# Altium PCB ARC.PcbDoc
Units mil, origin at the board's own origin, x right, y up, seen from the top; angles counter-clockwise.
Board outline 3900 x 2100 mil, 2 copper layers (Top Layer, Bottom Layer); 47 components, 145 nets, 312 pads, 6 vias.
Unrouted connection lines stored in the file: 137.
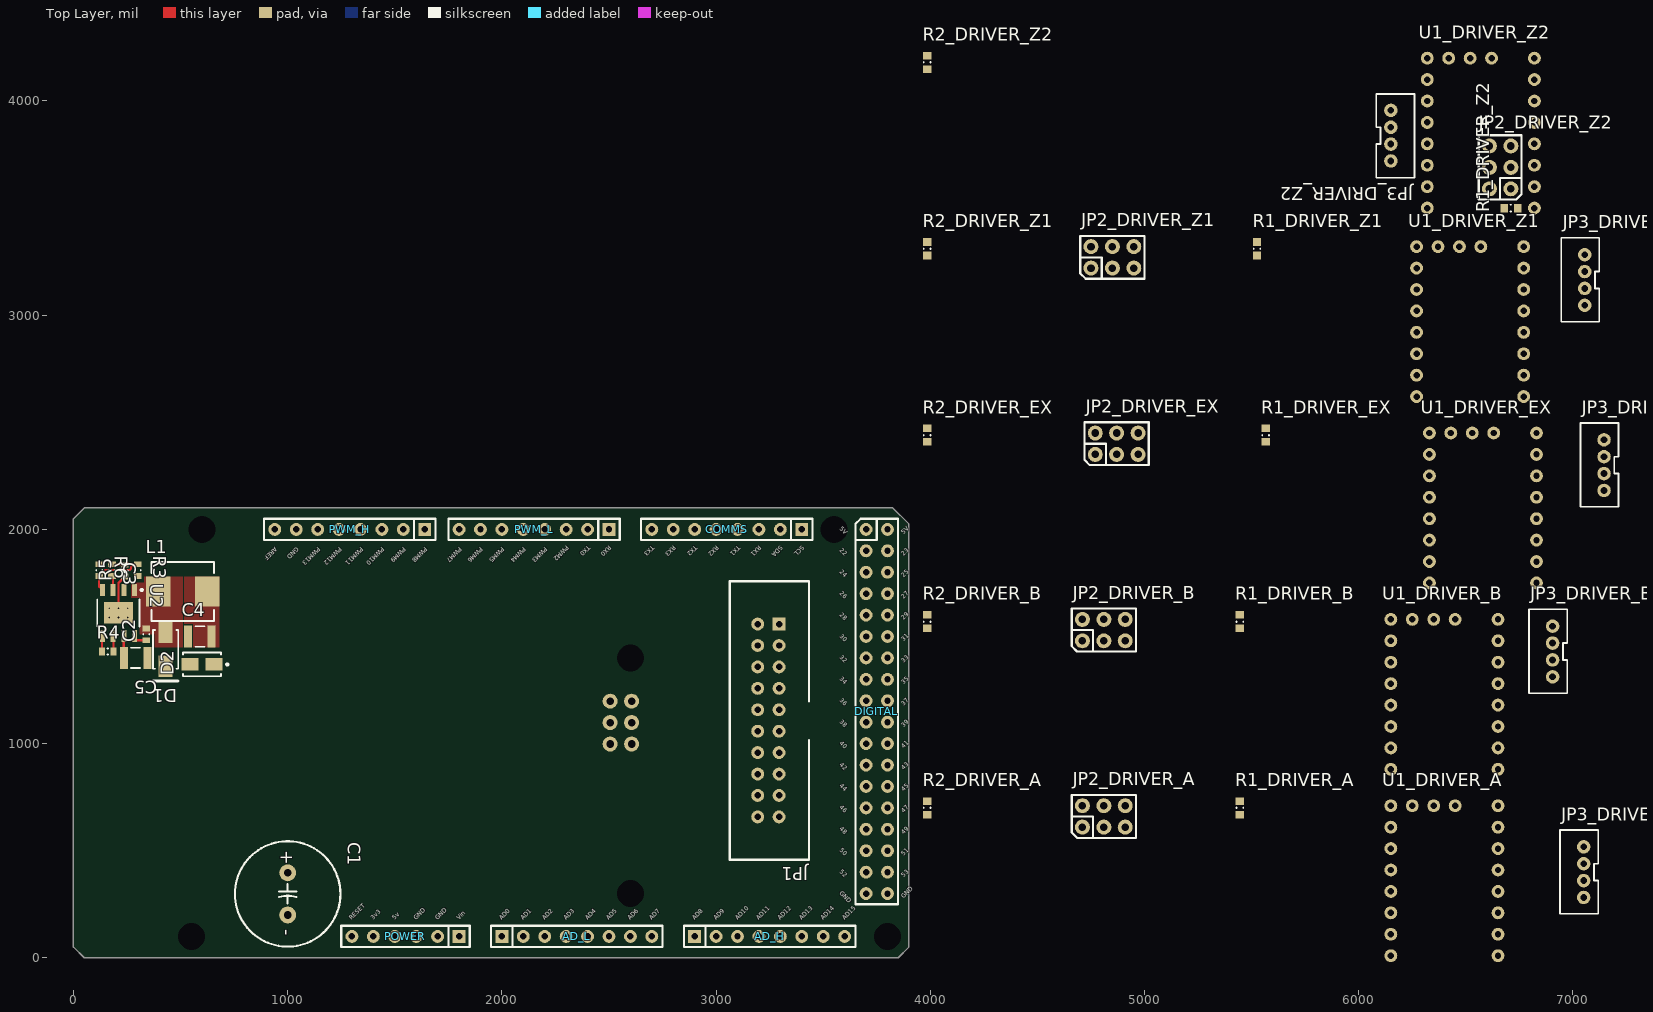
[diagram p0: Top Layer view]
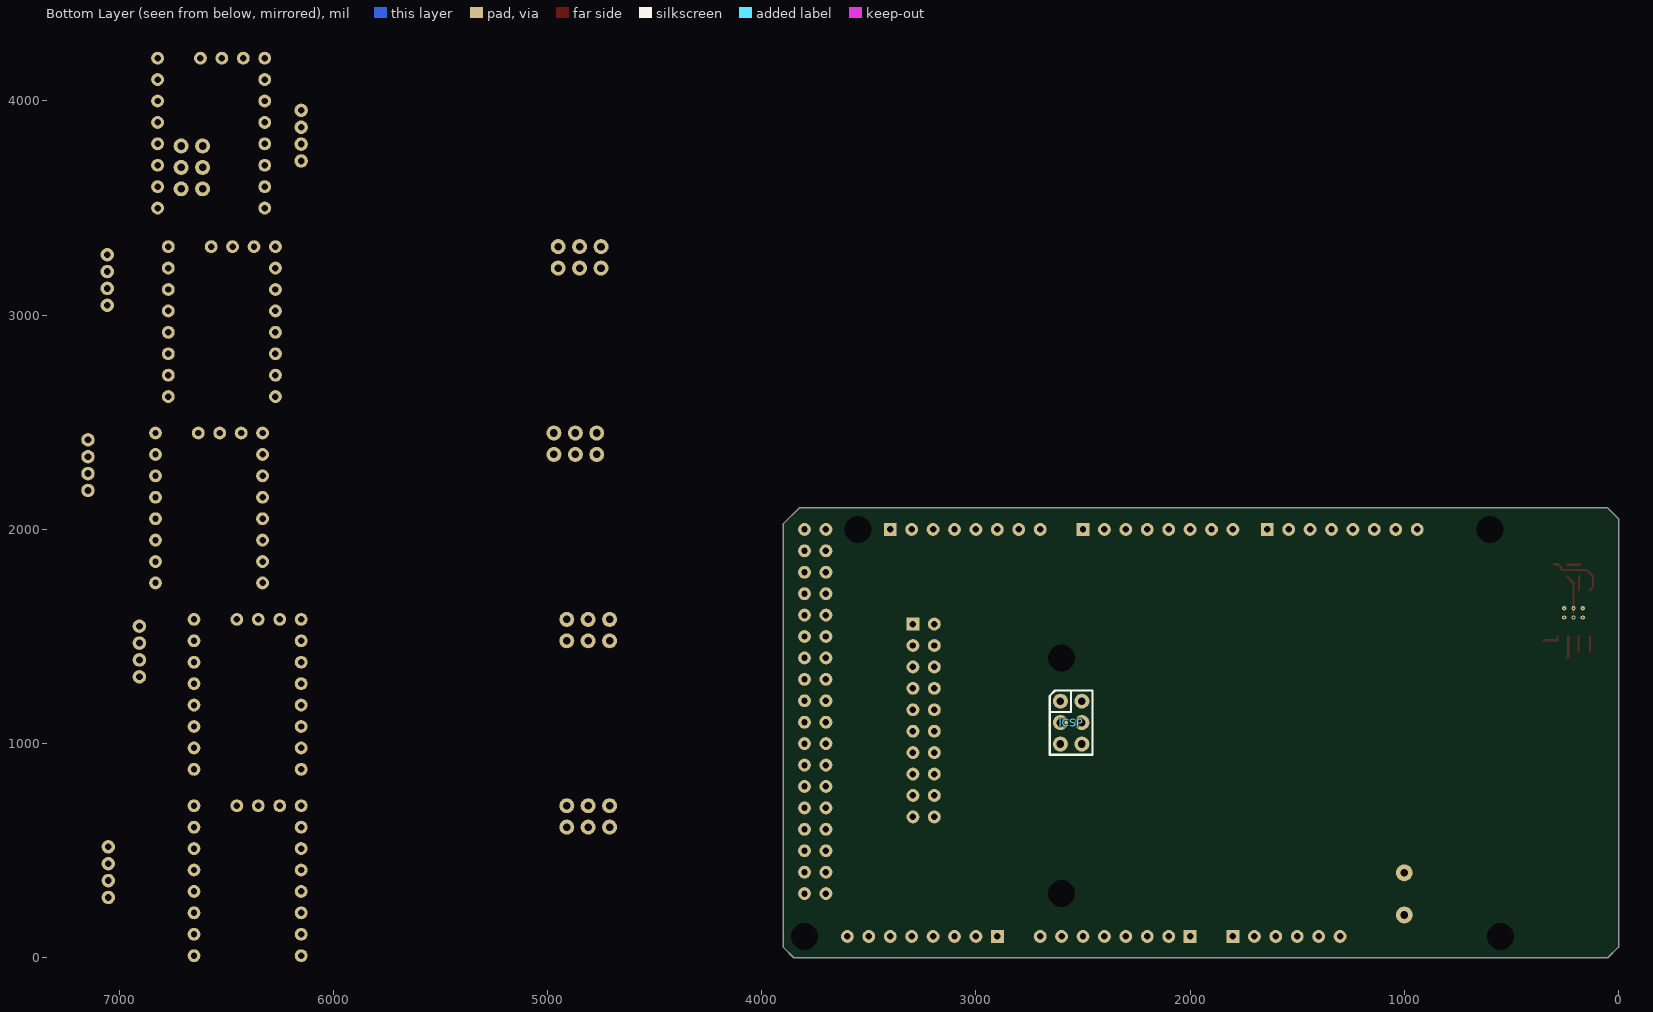
[diagram p1: Bottom Layer view, seen from below]

## Layer stack, top to bottom
Top Solder: solder mask 0.4, Solder Resist, Dk 3.5
Top Layer: signal copper 1.4
Dielectric1: dielectric 12.6, FR-4, Dk 4.8
Bottom Layer: signal copper 1.4
Bottom Solder: solder mask 0.4, Solder Resist, Dk 3.5

## Board outline
50,0 0,50 0,2050 50,2100 3825,2100 3900,2025 3900,50 3850,0

## Design rules (kind name [scope] priority, off if disabled: settings)
Clearance [All] p1: gap=6
PolygonConnect PolygonConnect_1 [All vs IsNamedPolygon('Direct')] p1: connectstyle=Direct reliefconductorwidth=10 reliefentries=4 polygonreliefangle="90 Angle" airgapwidth=10
PolygonConnect [All] p2: connectstyle=Relief reliefconductorwidth=10 reliefentries=4 polygonreliefangle="90 Angle" airgapwidth=10
RoomDefinition ARC [InComponentClass('ARC')] p1: confinementstyle=ConfineIn formatcopy=TRUE lockcomponents=FALSE outline -1200,-1230 800,-1230 800,-230 -1200,-230
RoomDefinition Designator [InComponentClass('Designator')] p2: confinementstyle=ConfineIn formatcopy=TRUE lockcomponents=FALSE outline 0,1230 780,1230 780,1980 0,1980
RoomDefinition DRIVER_Z2 [InComponentClass('DRIVER_Z2')] p3: confinementstyle=ConfineIn formatcopy=TRUE lockcomponents=FALSE outline 3945,3435 7810,3435 7810,4360 3945,4360
RoomDefinition DRIVER_Z1 [InComponentClass('DRIVER_Z1')] p4: confinementstyle=ConfineIn formatcopy=TRUE lockcomponents=FALSE outline 3945,2565 7710,2565 7710,3490 3945,3490
RoomDefinition DRIVER_EX [InComponentClass('DRIVER_EX')] p5: confinementstyle=ConfineIn formatcopy=TRUE lockcomponents=FALSE outline 3945,1695 7810,1695 7810,2620 3945,2620
RoomDefinition DRIVER_B [InComponentClass('DRIVER_B')] p6: confinementstyle=ConfineIn formatcopy=TRUE lockcomponents=FALSE outline 3945,825 7510,825 7510,1750 3945,1750
RoomDefinition DRIVER_A [InComponentClass('DRIVER_A')] p7: confinementstyle=ConfineIn formatcopy=TRUE lockcomponents=FALSE outline 3945,-45 7510,-45 7510,880 3945,880
RoutingVias [All] p1: holewidth=28 width=50 viastyle="Through Hole" minholewidth=28 minwidth=50 maxholewidth=28 maxwidth=50
SilkToSolderMaskClearance SilkscreenOverComponentPads [IsPad] p1: minsilkscreentomaskgap=10 clearancetoexposedcopper=TRUE
SolderMaskExpansion [All] p1: expansion=4
Width [All] p1: maxlimit=10 minlimit=10 preferedwidth=10
29 further rules are at their usual default settings.

## Classes and differential pairs
component class Designator: C2 C3 C4 C5 D1 D2 L1 R3 R4 R5 R6 U2
component class ARC: * AD_H AD_L Analog C1 COMMS DIGITAL ICSP JP1 POWER PWM_H PWM_L
component class DRIVER_A: JP2_DRIVER_A JP3_DRIVER_A JP*_DRIVER_A R1_DRIVER_A R2_DRIVER_A U1_DRIVER_A
component class DRIVER_B: JP2_DRIVER_B JP3_DRIVER_B JP*_DRIVER_B R1_DRIVER_B R2_DRIVER_B U1_DRIVER_B
component class DRIVER_EX: JP2_DRIVER_EX JP3_DRIVER_EX JP*_DRIVER_EX R1_DRIVER_EX R2_DRIVER_EX U1_DRIVER_EX
component class DRIVER_Z1: JP2_DRIVER_Z1 JP3_DRIVER_Z1 JP*_DRIVER_Z1 R1_DRIVER_Z1 R2_DRIVER_Z1 U1_DRIVER_Z1
component class DRIVER_Z2: JP2_DRIVER_Z2 JP3_DRIVER_Z2 JP*_DRIVER_Z2 R1_DRIVER_Z2 R2_DRIVER_Z2 U1_DRIVER_Z2
channel class StepperDriver: DRIVER_A DRIVER_B DRIVER_EX DRIVER_Z1 DRIVER_Z2

## Components (designator, comment, footprint, x,y, rotation, side; value= is the part's Value field where it differs from the comment)
AD_H "AD_H" "HEADER 8X1 8.5MM" 2900,100 r0 top locked
AD_L "AD_L" "HEADER 8X1 8.5MM" 2000,100 r0 top locked
C1 "1000uF" CAP_12.5mm 1000,396.85 r270 top
C2 "100nF" CAPC0603(1608)100_L 340,1510 r90 top
C3 "150pF" CAPC0603(1608)100_L 180,1810 r270 top
C4 "22uF" CAPC1210(3225)170_L 590,1500 r0 top
C5 "10uF" CAPC1210(3225)280_L 290,1400 r180 top
COMMS "Communication" "HEADER 8X1 8.5MM" 3400,2000 r180 top locked
D1 "B340A" DIOD-SMA-2_V 430,1440 r270 top
D2 "5V TVS" VISH-DO-214AC-2_L 600,1370 r180 top
DIGITAL "IO_36" "HEADER 36X 8MM" 3800,2000 r270 top locked
ICSP "ICSP" ICSP 2605.51,1198.03 r180 bottom locked
JP1 "EXTRUDER_OUT" IDC20 3294,1558 r270 top
JP2_DRIVER_A "2x3 HEADER" "2X3 HEADER" 4710,610 r90 top (schematic designator JP2)
JP2_DRIVER_B "2x3 HEADER" "2X3 HEADER" 4710,1480 r90 top (schematic designator JP2)
JP2_DRIVER_EX "2x3 HEADER" "2X3 HEADER" 4770,2350 r90 top (schematic designator JP2)
JP2_DRIVER_Z1 "2x3 HEADER" "2X3 HEADER" 4750,3220 r90 top (schematic designator JP2)
JP2_DRIVER_Z2 "2x3 HEADER" "2X3 HEADER" 6710,3590 r180 top (schematic designator JP2)
JP3_DRIVER_A "JST_PH 4" "JST_PH 4" 7050,400 r90 top (schematic designator JP3)
JP3_DRIVER_B "JST_PH 4" "JST_PH 4" 6905,1430 r90 top (schematic designator JP3)
JP3_DRIVER_EX "JST_PH 4" "JST_PH 4" 7145,2300 r90 top (schematic designator JP3)
JP3_DRIVER_Z1 "JST_PH 4" "JST_PH 4" 7055,3164.37 r90 top (schematic designator JP3)
JP3_DRIVER_Z2 "JST_PH 4" "JST_PH 4" 6150,3838.11 r270 top (schematic designator JP3)
L1 "0630 Inductor" "0630 INDUCTOR" 510,1710 r0 top
POWER "POWER" "HEADER 6X1 8.5MM" 1800,100 r180 top locked
PWM_H "PWM_H" "HEADER 8X1 8.5MM" 1640,2000 r180 top locked
PWM_L "PWM_L" "HEADER 8X1 8.5MM" 2500,2000 r180 top locked
R1_DRIVER_A "10K" RESC0603(1608)_N 5445,700 r90 top (schematic designator R1)
R1_DRIVER_B "10K" RESC0603(1608)_N 5445,1570 r90 top (schematic designator R1)
R1_DRIVER_EX "10K" RESC0603(1608)_N 5565,2440 r90 top (schematic designator R1)
R1_DRIVER_Z1 "10K" RESC0603(1608)_N 5525,3310 r90 top (schematic designator R1)
R1_DRIVER_Z2 "10K" RESC0603(1608)_N 6710,3500 r180 top (schematic designator R1)
R2_DRIVER_A "100K" RESC0603(1608)_N 3985,700 r90 top (schematic designator R2)
R2_DRIVER_B "100K" RESC0603(1608)_N 3985,1570 r90 top (schematic designator R2)
R2_DRIVER_EX "100K" RESC0603(1608)_N 3985,2440 r90 top (schematic designator R2)
R2_DRIVER_Z1 "100K" RESC0603(1608)_N 3985,3310 r90 top (schematic designator R2)
R2_DRIVER_Z2 "100K" RESC0603(1608)_N 3985,4180 r90 top (schematic designator R2)
R3 "210K" RESC0603(1608)_L 300,1810 r270 top
R4 "100K" RESC0603(1608)_L 160,1430 r0 top
R5 "100K" RESC0603(1608)_L 240,1807.56 r90 top
R6 "40k2" RESC0603(1608)_L 120,1810 r270 top
U1_DRIVER_A "Stepper Driver" SureStepr 6700,-40 r90 top (schematic designator U1)
U1_DRIVER_B "Stepper Driver" SureStepr 6700,830 r90 top (schematic designator U1)
U1_DRIVER_EX "Stepper Driver" SureStepr 6880,1700 r90 top (schematic designator U1)
U1_DRIVER_Z1 "Stepper Driver" SureStepr 6820,2570 r90 top (schematic designator U1)
U1_DRIVER_Z2 "Stepper Driver" SureStepr 6870,3450 r90 top (schematic designator U1)
U2 "MP1584" SOIC8E 135,1502.72 r270 top

## Footprints (in the part's own frame and the unit in brackets; to place one, negate y for a bottom-side part, rotate by r counter-clockwise, add the part's x,y. Pads: shape width x height; smd on the part's side, far side on the other; paste and mask are expansions set on the pad)
"2X3 HEADER" [mil] "0.1\" Header"
  round 70 hole 35.43: 1(0,0) 2(100,0) 3(0,-100) 4(100,-100) 5(0,-200) 6(100,-200)
  silkscreen extent -50,-250 150,50, body extent -50,-250 150,50, height 374
"0630 INDUCTOR" [mm] "Precision Wire Wound Inductor, 2-Leads, Body 7.40x7.00mm, IPC Medium Density"
  rect 2.9x3.55 smd: 1(-2.9,0) 2(2.9,0)
  silkscreen extent -3.7,-3.5 3.7,3.5, body extent -3.7,-3.5 3.7,3.5, height 3
CAP_12.5mm [mm]
  round 2 hole 0.9: 0(0,0) 1(5,0)
  silkscreen extent -3.75,-6.25 8.75,6.25, body extent -3.75,-6.25 8.75,6.25, height 20
CAPC0603(1608)100_L [mm] "Chip Capacitor, Body 1.6x0.8mm, Height 1.0mm, IPC High Density"
  rect 0.7x0.9 smd: 1(-0.7,0) 2(0.7,0)
  silkscreen extent -0.05,-0.35 0.05,0.35, body extent -0.87,-0.47 0.88,0.48, height 1
CAPC1210(3225)170_L [mm] "Chip Capacitor, Body 3.2x2.5mm, Height 1.7mm, IPC High Density"
  rect 0.95x2.6 smd: 1(-1.4,0) 2(1.4,0)
  silkscreen extent -0.55,-1.2 0.55,1.2, body extent -1.7,-1.35 1.7,1.35, height 1.7
CAPC1210(3225)280_L [mm] "Chip Capacitor, Body 3.2x2.5mm, Height 2.8mm, IPC High Density"
  rect 0.95x2.6 smd: 1(-1.4,0) 2(1.4,0)
  silkscreen extent -0.55,-1.2 0.55,1.2, body extent -1.7,-1.4 1.7,1.4, height 2.8
DIOD-SMA-2_V [mm] "Molded Diode, 2-Leads, Body 4.6x2.92mm"
  rect 2.5x1.7 smd: 1(-2,0) 2(2,0)
  silkscreen extent -2.3,-1.5 3.75,1.5, body extent -2.52,-1.46 2.52,1.46, height 2.4
"HEADER 6X1 8.5MM" [mil] "Stackable 6 pin header"
  rect 60x60 hole 30: 1(0,0)
  round 60 hole 30: 2(100,0) 3(200,0) 4(300,0) 5(400,0) 6(500,0)
  silkscreen extent -50,-50 550,50, body extent -50,-50 550,50, height 126
"HEADER 8X1 8.5MM" [mil] "Stackable 8 pin header"
  rect 60x60 hole 30: 1(0,0)
  round 60 hole 30: 2(100,0) 3(200,0) 4(300,0) 5(400,0) 6(500,0) 7(600,0) 8(700,0)
  silkscreen extent -50,-50 750,50, body extent -50,-50 750,50, height 126
"HEADER 36X 8MM" [mil] "Stackable 10 pin header"
  round 60 hole 30: 1(0,-100) 2(0,0) 3(100,-100) 4(100,0) 5(200,-100) 6(200,0) 7(300,-100) 8(300,0) 9(400,-100) 10(400,0) 11(500,-100) 12(500,0) 13(600,-100) 14(600,0) 15(700,-100) 16(700,0) 17(800,-100) 18(800,0) 19(900,0) 20(900,-100) 21(1000,-100) 22(1000,0) 23(1100,-100) 24(1100,0) 25(1200,-100) 26(1200,0) 27(1300,-100) 28(1300,0) 29(1400,-100) 30(1400,0) 31(1500,-100) 32(1500,0) 33(1600,-100) 34(1600,0) 35(1700,-100) 36(1700,0)
  silkscreen extent -50,-150 1750,50, body extent -50,-150 1750,50, height 126
ICSP [mil]
  round 70 hole 35.43: 1(0,0) 2(100,0) 3(0,-100) 4(100,-100) 5(0,-200) 6(100,-200)
  silkscreen extent -50,-250 150,50, body extent -50,-250 150,50, height 82
IDC20 [mil] "Stackable 10 pin header"
  rect 60x60 hole 30: 1(0,0)
  round 60 hole 30: 2(100,0) 3(200,0) 4(300,0) 5(400,0) 6(500,0) 7(600,0) 8(700,0) 9(800,0) 10(900,0) 11(0,-100) 12(100,-100) 13(200,-100) 14(300,-100) 15(400,-100) 16(500,-100) 17(600,-100) 18(700,-100) 19(800,-100) 20(900,-100)
  silkscreen extent -200,-230 1100,140, body extent -200,-228 1100,132, height 390
"JST_PH 4" [mil]
  round 63 hole 31.5: 1(-118.11,0) 2(-39.37,0) 3(39.37,0) 4(118.11,0)
  silkscreen extent -195,-68 197,110, body extent -195,-70 195,107, height 236
RESC0603(1608)_L [mm] "Chip Resistor, Body 1.6x0.8mm, IPC High Density"
  rect 0.7x0.9 smd: 1(-0.7,0) 2(0.7,0)
  silkscreen extent -0.05,-0.35 0.05,0.35, body extent -0.85,-0.47 0.85,0.47, height 0.6
RESC0603(1608)_N [mm] "Chip Resistor, Body 1.6x0.8mm, IPC Medium Density"
  rect 0.9x1 smd: 1(-0.8,0) 2(0.8,0)
  silkscreen extent -0.05,-0.4 0.05,0.4, body extent -0.85,-0.47 0.85,0.47, height 0.6
SOIC8E [mm] "SOIC, 8-Leads, Body 4.90x3.90mm, Pitch 1.27mm, Thermal Pad 3.45x2.56mm, IPC Medium Density"
  rect 1.45x0.6 smd: 1(-5.45,3.81) 2(-5.45,2.54) 3(-5.45,1.27) 4(-5.45,0) 5(0,0) 6(0,1.27) 7(0,2.54) 8(0,3.81)
  rect 2.56x3.45 smd: 9(-2.725,1.905)
  silkscreen extent -5.57,-0.6 -1.13,4.79, body extent -4.73,-0.6 -0.73,4.41, height 1.5
SureStepr [mil]
  round 60 hole 30: 1A(450,550) 1B(550,550) 2A(350,550) 2B(250,550) DECAY(750,250) DIR(750,50) ENABLE(50,50) FAULT(750,350) GND(150,550) GND(750,550) MS1(150,50) MS2(250,50) MS3(350,50) RESET(450,50) SLEEP(550,50) STEP(650,50) VDD(650,550) VMOT(50,550) VREF(750,450)
  body extent 0,0 800,600, height 722
VISH-DO-214AC-2_L [mm] "DO-214AC, 2-Leads, Body 4.5x2.79mm, IPC High Density"
  rect 2.05x1.45 smd: 1(-1.425,0) 2(1.425,0)
  silkscreen extent -3.13,-1.4 2.25,1.4, body extent -2.25,-1.4 2.25,1.4, height 2.29

## Part data
C1: library part CAP_12.5MM_GENERIC, "Generic electrolytic capacitor w/ 12.5mm diameter and 5mm pitch"
C2: library part CMP-1035-02591-1, "CAP 100nF 50V ±5% 0603 (1608 Metric) Thickness 1mm SMD"
C3: library part CMP-1035-01367-1, "CAP 150pF 50V ±5% 0603 (1608 Metric) Thickness 1mm SMD"
C4: library part CMP-1038-02258-1, "CAP 22uF 6.3V ±10% 1210 (3225 Metric) Thickness 1.7mm SMD"
C5: library part CMP-1038-02234-1, "CAP 10uF 35V ±10% 1210 (3225 Metric) Thickness 2.8mm SMD"
D1: library part CMP-1667-00003-1, "Surface Mount Schottky Barrier Rectifier, 40 V, 3 A, -55 to 150 degC, 2-Pin SMA, RoHS, Tape and Reel"
D2: library part CMP-0548-00062-2, "Transient Voltage Suppressor, 6.40 to 231 V, 5 V Stand-off Voltage, Uni-Directional, -55 to 155 degC, 2-pin DO-214AC, Pb-Free, Tape and Reel"
JP1: library part IDC20
L1: library part PCC-M0630M
R1_DRIVER_A R1_DRIVER_B R1_DRIVER_EX R1_DRIVER_Z1 R1_DRIVER_Z2: library part CMP-1012-00098-1, "10K 0.1W 5% 0603 (1608 Metric)  SMD"
R2_DRIVER_A R2_DRIVER_B R2_DRIVER_EX R2_DRIVER_Z1 R2_DRIVER_Z2 R4 R5: library part CMP-1012-00122-1, "100K 0.1W 5% 0603 (1608 Metric)  SMD"
R3: library part CMP-1012-00770-1, "210K 0.1W 1% 0603 (1608 Metric)  SMD"
R6: library part CMP-1012-00691-1, "40K2 0.1W 1% 0603 (1608 Metric)  SMD"
U2: "MP1584 3A, 1.5MHz, 28V Step-Down Converter"

## Free pads (board coordinates)
  round 62.99 hole 125.98: 0(550,100) 0(600,2000) 0(2600,300) 0(2600,1400) 0(3550,2000) 0(3800,100)

## Via types
v1: diameter 19.68, hole 7.87, Top Layer to Bottom Layer, 6 vias

## Nets (pads, with @x,y where several pads share a name; then routed paths per layer and width w, separated by ;. In a path a pad name is that pad's centre, name@x,y a point inside that pad or via, vN(x,y) a via of type N, cw(c..) or ccw(c..) an arc to the next point about the centre after c; other vN are vias at no path point)
3V3: POWER.5
5V: C4.2 D2.1 DIGITAL.1 DIGITAL.2 ICSP.2 JP1.1 JP2_DRIVER_A.2 JP2_DRIVER_A.4 JP2_DRIVER_A.6 JP2_DRIVER_B.2 JP2_DRIVER_B.4 JP2_DRIVER_B.6 JP2_DRIVER_EX.2 JP2_DRIVER_EX.4 JP2_DRIVER_EX.6 JP2_DRIVER_Z1.2 JP2_DRIVER_Z1.4 JP2_DRIVER_Z1.6 JP2_DRIVER_Z2.2 JP2_DRIVER_Z2.4 JP2_DRIVER_Z2.6 L1.2 POWER.4 R1_DRIVER_A.2 R1_DRIVER_B.2 R1_DRIVER_EX.2 R1_DRIVER_Z1.2 R1_DRIVER_Z2.2 R3.2 U1_DRIVER_A.VDD U1_DRIVER_B.VDD U1_DRIVER_EX.VDD U1_DRIVER_Z1.VDD U1_DRIVER_Z2.VDD
24V: C1.0 C5.2 JP1.5 U1_DRIVER_A.VMOT U1_DRIVER_B.VMOT U1_DRIVER_EX.VMOT U1_DRIVER_Z1.VMOT U1_DRIVER_Z2.VMOT U2.7 | length 104.8
  Top Layer w10: U2.7 235,1405 C5.2@240,1400
AD3: AD_L.4
AD4: AD_L.5
AD5: AD_L.6
AD8: AD_H.1
AD9: AD_H.2
AD10: AD_H.3
AD11: AD_H.4
AD12: AD_H.5
AD13: AD_H.6
AD14: AD_H.7
AD15: AD_H.8
AREF: PWM_H.8
EX_DIR: U1_DRIVER_EX.DIR
EX_STEP: U1_DRIVER_EX.STEP
EX_VREF: U1_DRIVER_EX.VREF
EXTRUDER_1A: JP1.7 JP1.17
EXTRUDER_1B: JP1.8 JP1.18
EXTRUDER_2A: JP1.9 JP1.19
EXTRUDER_2B: JP1.10 JP1.20
FAN: JP1.6
GND: C1.1 C4.1 C5.1 D1.2 D2.2 DIGITAL.35 DIGITAL.36 ICSP.6 JP1.4 JP1.13 JP1.14 POWER.2 POWER.3 PWM_H.7 R2_DRIVER_A.1 R2_DRIVER_B.1 R2_DRIVER_EX.1 R2_DRIVER_Z1.1 R2_DRIVER_Z2.1 R4.1 R5.1 R6.1 U1_DRIVER_A.GND U1_DRIVER_B.GND U1_DRIVER_EX.GND U1_DRIVER_Z1.GND U1_DRIVER_Z2.GND U2.5 U2.9 | length 256.2
  Top Layer w10: R4.1 132.44,1500.16 U2.5 ; U2.9 v1(210,1631.65) 210,1750 R5.1
  other v1: 166.69,1588.35 210,1588.35 253.31,1588.35 166.69,1631.65 253.31,1631.65
HEATER: JP1.15 JP1.16
IO22: DIGITAL.3
IO23: DIGITAL.4
IO24: DIGITAL.5
IO25: DIGITAL.6
IO26: DIGITAL.7
IO27: DIGITAL.8
IO28: DIGITAL.9
IO29: DIGITAL.10
IO30: DIGITAL.11
IO31: DIGITAL.12
IO32: DIGITAL.13
IO33: DIGITAL.14
IO34: DIGITAL.15
IO35: DIGITAL.16
IO36: DIGITAL.17
IO37: DIGITAL.18
IO38: DIGITAL.19
IO39: DIGITAL.20
IO40: DIGITAL.21
IO41: DIGITAL.22
IO42: DIGITAL.23
IO43: DIGITAL.24
IO44: DIGITAL.25
IO45: DIGITAL.26
IO46: DIGITAL.27
IO47: DIGITAL.28
IO48: DIGITAL.29
IO49: DIGITAL.30
IO50: DIGITAL.31
IO51: DIGITAL.32
IO52: DIGITAL.33
IO53: DIGITAL.34
MISO: ICSP.1
MOSI: ICSP.4
MOTOR_1A_DRIVER_A: JP3_DRIVER_A.2 U1_DRIVER_A.1A
MOTOR_1A_DRIVER_B: JP3_DRIVER_B.2 U1_DRIVER_B.1A
MOTOR_1A_DRIVER_EX: JP3_DRIVER_EX.2 U1_DRIVER_EX.1A
MOTOR_1A_DRIVER_Z1: JP3_DRIVER_Z1.2 U1_DRIVER_Z1.1A
MOTOR_1A_DRIVER_Z2: JP3_DRIVER_Z2.2 U1_DRIVER_Z2.1A
MOTOR_1B_DRIVER_A: JP3_DRIVER_A.1 U1_DRIVER_A.1B
MOTOR_1B_DRIVER_B: JP3_DRIVER_B.1 U1_DRIVER_B.1B
MOTOR_1B_DRIVER_EX: JP3_DRIVER_EX.1 U1_DRIVER_EX.1B
MOTOR_1B_DRIVER_Z1: JP3_DRIVER_Z1.1 U1_DRIVER_Z1.1B
MOTOR_1B_DRIVER_Z2: JP3_DRIVER_Z2.1 U1_DRIVER_Z2.1B
MOTOR_2A_DRIVER_A: JP3_DRIVER_A.3 U1_DRIVER_A.2A
MOTOR_2A_DRIVER_B: JP3_DRIVER_B.3 U1_DRIVER_B.2A
MOTOR_2A_DRIVER_EX: JP3_DRIVER_EX.3 U1_DRIVER_EX.2A
MOTOR_2A_DRIVER_Z1: JP3_DRIVER_Z1.3 U1_DRIVER_Z1.2A
MOTOR_2A_DRIVER_Z2: JP3_DRIVER_Z2.3 U1_DRIVER_Z2.2A
MOTOR_2B_DRIVER_A: JP3_DRIVER_A.4 U1_DRIVER_A.2B
MOTOR_2B_DRIVER_B: JP3_DRIVER_B.4 U1_DRIVER_B.2B
MOTOR_2B_DRIVER_EX: JP3_DRIVER_EX.4 U1_DRIVER_EX.2B
MOTOR_2B_DRIVER_Z1: JP3_DRIVER_Z1.4 U1_DRIVER_Z1.2B
MOTOR_2B_DRIVER_Z2: JP3_DRIVER_Z2.4 U1_DRIVER_Z2.2B
NetC2_1: C2.1 U2.8 | length 85.3
  Top Layer w10: U2.8 285,1482.44 C2.1@350,1482.44
NetC2_2: C2.2 D1.1 L1.1 U2.1
NetC3_1: C3.1 R5.2 | length 61
  Top Layer w10: C3.1 182.44,1835.12 R5.2
NetC3_2: C3.2 U2.3 | length 67.2
  Top Layer w10: C3.2 185,1777.44 U2.3
NetJP2_DRIVER_A_1: JP2_DRIVER_A.1 JP2_DRIVER_A.5 R2_DRIVER_A.2 U1_DRIVER_A.MS1 U1_DRIVER_A.MS3
NetJP2_DRIVER_A_3: JP2_DRIVER_A.3 U1_DRIVER_A.MS2
NetJP2_DRIVER_B_1: JP2_DRIVER_B.1 JP2_DRIVER_B.5 R2_DRIVER_B.2 U1_DRIVER_B.MS1 U1_DRIVER_B.MS3
NetJP2_DRIVER_B_3: JP2_DRIVER_B.3 U1_DRIVER_B.MS2
NetJP2_DRIVER_EX_1: JP2_DRIVER_EX.1 JP2_DRIVER_EX.5 R2_DRIVER_EX.2 U1_DRIVER_EX.MS1 U1_DRIVER_EX.MS3
NetJP2_DRIVER_EX_3: JP2_DRIVER_EX.3 U1_DRIVER_EX.MS2
NetJP2_DRIVER_Z1_1: JP2_DRIVER_Z1.1 JP2_DRIVER_Z1.5 R2_DRIVER_Z1.2 U1_DRIVER_Z1.MS1 U1_DRIVER_Z1.MS3
NetJP2_DRIVER_Z1_3: JP2_DRIVER_Z1.3 U1_DRIVER_Z1.MS2
NetJP2_DRIVER_Z2_1: JP2_DRIVER_Z2.1 JP2_DRIVER_Z2.5 R2_DRIVER_Z2.2 U1_DRIVER_Z2.MS1 U1_DRIVER_Z2.MS3
NetJP2_DRIVER_Z2_3: JP2_DRIVER_Z2.3 U1_DRIVER_Z2.MS2
NetR1_DRIVER_A_1: R1_DRIVER_A.1 U1_DRIVER_A.ENABLE
NetR1_DRIVER_B_1: R1_DRIVER_B.1 U1_DRIVER_B.ENABLE
NetR1_DRIVER_EX_1: R1_DRIVER_EX.1 U1_DRIVER_EX.ENABLE
NetR1_DRIVER_Z1_1: R1_DRIVER_Z1.1 U1_DRIVER_Z1.ENABLE
NetR1_DRIVER_Z2_1: R1_DRIVER_Z2.1 U1_DRIVER_Z2.ENABLE
NetR3_1: R3.1 R6.2 U2.4 | length 278.1
  Top Layer w10: U2.4 120,1732.28 R6.2 147.56,1810 261.93,1810 268.72,1816.78 268.72,1823.5 282.78,1837.56 R3.1
NetR4_2: R4.2 U2.6 | length 73.8
  Top Layer w10: U2.6 187.56,1500.16 R4.2
NetU1_DRIVER_A_RESET: U1_DRIVER_A.RESET U1_DRIVER_A.SLEEP
NetU1_DRIVER_B_RESET: U1_DRIVER_B.RESET U1_DRIVER_B.SLEEP
NetU1_DRIVER_EX_RESET: U1_DRIVER_EX.RESET U1_DRIVER_EX.SLEEP
NetU1_DRIVER_Z1_RESET: U1_DRIVER_Z1.RESET U1_DRIVER_Z1.SLEEP
NetU1_DRIVER_Z2_RESET: U1_DRIVER_Z2.RESET U1_DRIVER_Z2.SLEEP
NTC_EXT: JP1.2
PWM2: PWM_L.3
PWM3: PWM_L.4
PWM4: PWM_L.5
PWM5: PWM_L.6
PWM6: PWM_L.7
PWM7: PWM_L.8
PWM8: PWM_H.1
PWM9: PWM_H.2
PWM10: PWM_H.3
PWM11: PWM_H.4
PWM12: PWM_H.5
PWM13: PWM_H.6
RESET: ICSP.5 POWER.6
RX0: PWM_L.1
RX1: COMMS.3
RX2: COMMS.5
RX3: COMMS.7
SCK: ICSP.3
SCL: COMMS.1 JP1.12
SDA: COMMS.2 JP1.11
TX0: PWM_L.2
TX1: COMMS.4
TX2: COMMS.6
TX3: COMMS.8
VIN: POWER.1
WS2812: JP1.3
X_DIR: AD_L.2 U1_DRIVER_A.DIR
X_STEP: AD_L.1 U1_DRIVER_A.STEP
X_VREF: U1_DRIVER_A.VREF
Y_DIR: AD_L.8 U1_DRIVER_B.DIR
Y_EN: AD_L.3
Y_STEP: AD_L.7 U1_DRIVER_B.STEP
Y_VREF: U1_DRIVER_B.VREF
Z1_DIR: U1_DRIVER_Z1.DIR
Z1_STEP: U1_DRIVER_Z1.STEP
Z1_VREF: U1_DRIVER_Z1.VREF
Z2_DIR: U1_DRIVER_Z2.DIR
Z2_STEP: U1_DRIVER_Z2.STEP
Z2_VREF: U1_DRIVER_Z2.VREF
pads on no net: U1_DRIVER_A.DECAY U1_DRIVER_A.FAULT U1_DRIVER_B.DECAY U1_DRIVER_B.FAULT U1_DRIVER_EX.DECAY U1_DRIVER_EX.FAULT U1_DRIVER_Z1.DECAY U1_DRIVER_Z1.FAULT U1_DRIVER_Z2.DECAY U1_DRIVER_Z2.FAULT U2.2

## Polygon pours and split planes (outlines as drawn)
5V on Top Layer "Direct" (solid, pour order 2): 680,1450 680,1780 510,1780 510,1570 510,1560 560,1560 560,1450
NetC2_2 on Top Layer "Direct" (solid, pour order 0): 270,1750 330,1750 330,1780 510,1780 510,1450 440,1450 380,1450 380,1510 310,1510 310,1680 270,1680

## Silkscreen, mask and mechanical layers (free items; w line width, h text height)
Top Overlay:
  text "5V" at 3575,2000 h20 r315
  text "5V" at 3875,1975 h20 r45
  text "PWM2" at 2300,1925 h20 r225
  text "TX0" at 2400,1925 h20 r225
  text "RX0" at 2500,1925 h20 r225
  text "TX3" at 2700,1925 h20 r225
  text "RX3" at 2800,1925 h20 r225
  text "TX2" at 2900,1925 h20 r225
  text "RX2" at 3000,1925 h20 r225
  text "TX1" at 3100,1925 h20 r225
  text "RX1" at 3200,1925 h20 r225
  text "SDA" at 3300,1925 h20 r225
  text "SCL" at 3400,1925 h20 r225
  text "AREF" at 940,1920 h20 r225
  text "GND" at 1040,1920 h20 r225
  text "PWM13" at 1140,1920 h20 r225
  text "PWM12" at 1240,1920 h20 r225
  text "PWM11" at 1340,1920 h20 r225
  text "PWM10" at 1440,1920 h20 r225
  text "PWM9" at 1540,1920 h20 r225
  text "PWM8" at 1640,1920 h20 r225
  text "PWM7" at 1800,1917.93 h20 r225
  text "PWM6" at 1900,1917.93 h20 r225
  text "PWM5" at 2000,1917.93 h20 r225
  text "PWM4" at 2100,1917.93 h20 r225
  text "PWM3" at 2200,1917.93 h20 r225
  text "22" at 3575,1900 h20 r315
  text "23" at 3875,1875 h20 r45
  text "24" at 3575,1800 h20 r315
  text "25" at 3875,1775 h20 r45
  text "26" at 3575,1700 h20 r315
  text "27" at 3875,1675 h20 r45
  text "28" at 3575,1600 h20 r315
  text "29" at 3875,1575 h20 r45
  text "30" at 3575,1500 h20 r315
  text "31" at 3875,1475 h20 r45
  text "32" at 3575,1400 h20 r315
  text "33" at 3875,1375 h20 r45
  text "34" at 3575,1300 h20 r315
  text "35" at 3875,1275 h20 r45
  text "36" at 3575,1200 h20 r315
  text "37" at 3875,1175 h20 r45
  text "38" at 3575,1100 h20 r315
  text "39" at 3875,1075 h20 r45
  text "40" at 3575,1000 h20 r315
  text "41" at 3875,975 h20 r45
  text "42" at 3575,900 h20 r315
  text "43" at 3875,875 h20 r45
  text "44" at 3575,800 h20 r315
  text "45" at 3875,775 h20 r45
  text "46" at 3575,700 h20 r315
  text "47" at 3875,675 h20 r45
  text "48" at 3575,600 h20 r315
  text "49" at 3875,575 h20 r45
  text "50" at 3575,500 h20 r315
  text "51" at 3875,475 h20 r45
  text "52" at 3575,400 h20 r315
  text "53" at 3875,375 h20 r45
  text "GND" at 3575,300 h20 r315
  text "GND" at 3875,275 h20 r45
  text "RESET" at 1300,175 h20 r45
  text "3v3" at 1400,175 h20 r45
  text "5v" at 1500,175 h20 r45
  text "GND" at 1600,175 h20 r45
  text "GND" at 1700,175 h20 r45
  text "Vin" at 1800,175 h20 r45
  text "AD0" at 2000,175 h20 r45
  text "AD1" at 2100,175 h20 r45
  text "AD2" at 2200,175 h20 r45
  text "AD3" at 2300,175 h20 r45
  text "AD4" at 2400,175 h20 r45
  text "AD5" at 2500,175 h20 r45
  text "AD6" at 2600,175 h20 r45
  text "AD7" at 2700,175 h20 r45
  text "AD8" at 2900,175 h20 r45
  text "AD9" at 3000,175 h20 r45
  text "AD10" at 3100,175 h20 r45
  text "AD11" at 3200,175 h20 r45
  text "AD12" at 3300,175 h20 r45
  text "AD13" at 3400,175 h20 r45
  text "AD14" at 3500,175 h20 r45
  text "AD15" at 3600,175 h20 r45
Mechanical 1:
  circle w5: c3800,100 r62.99
  circle w5: c3550,2000 r62.99
  circle w5: c2600,1400 r62.99
  circle w5: c2600,300 r62.99
  circle w5: c550,100 r62.99
  circle w5: c600,2000 r62.99
  lines w5: 0,50 0,2050 50,2100 3825,2100 3900,2025 3900,1600 3900,50 3850,0 50,0 0,50

## Text inside footprints (layer, text, board x,y; h text height)
C1: Top Overlay "+" at 968.5,503.15 h60 r270; Top Overlay "-" at 970,133.85 h60 r270